# Altium PCB PCB2.PcbDoc
Units mil, origin at the board's own origin, x right, y up, seen from the top; angles counter-clockwise.
Board outline 3935 x 3935 mil, 2 copper layers (Top Layer, Bottom Layer); 64 components, 66 nets, 253 pads, 3 vias.
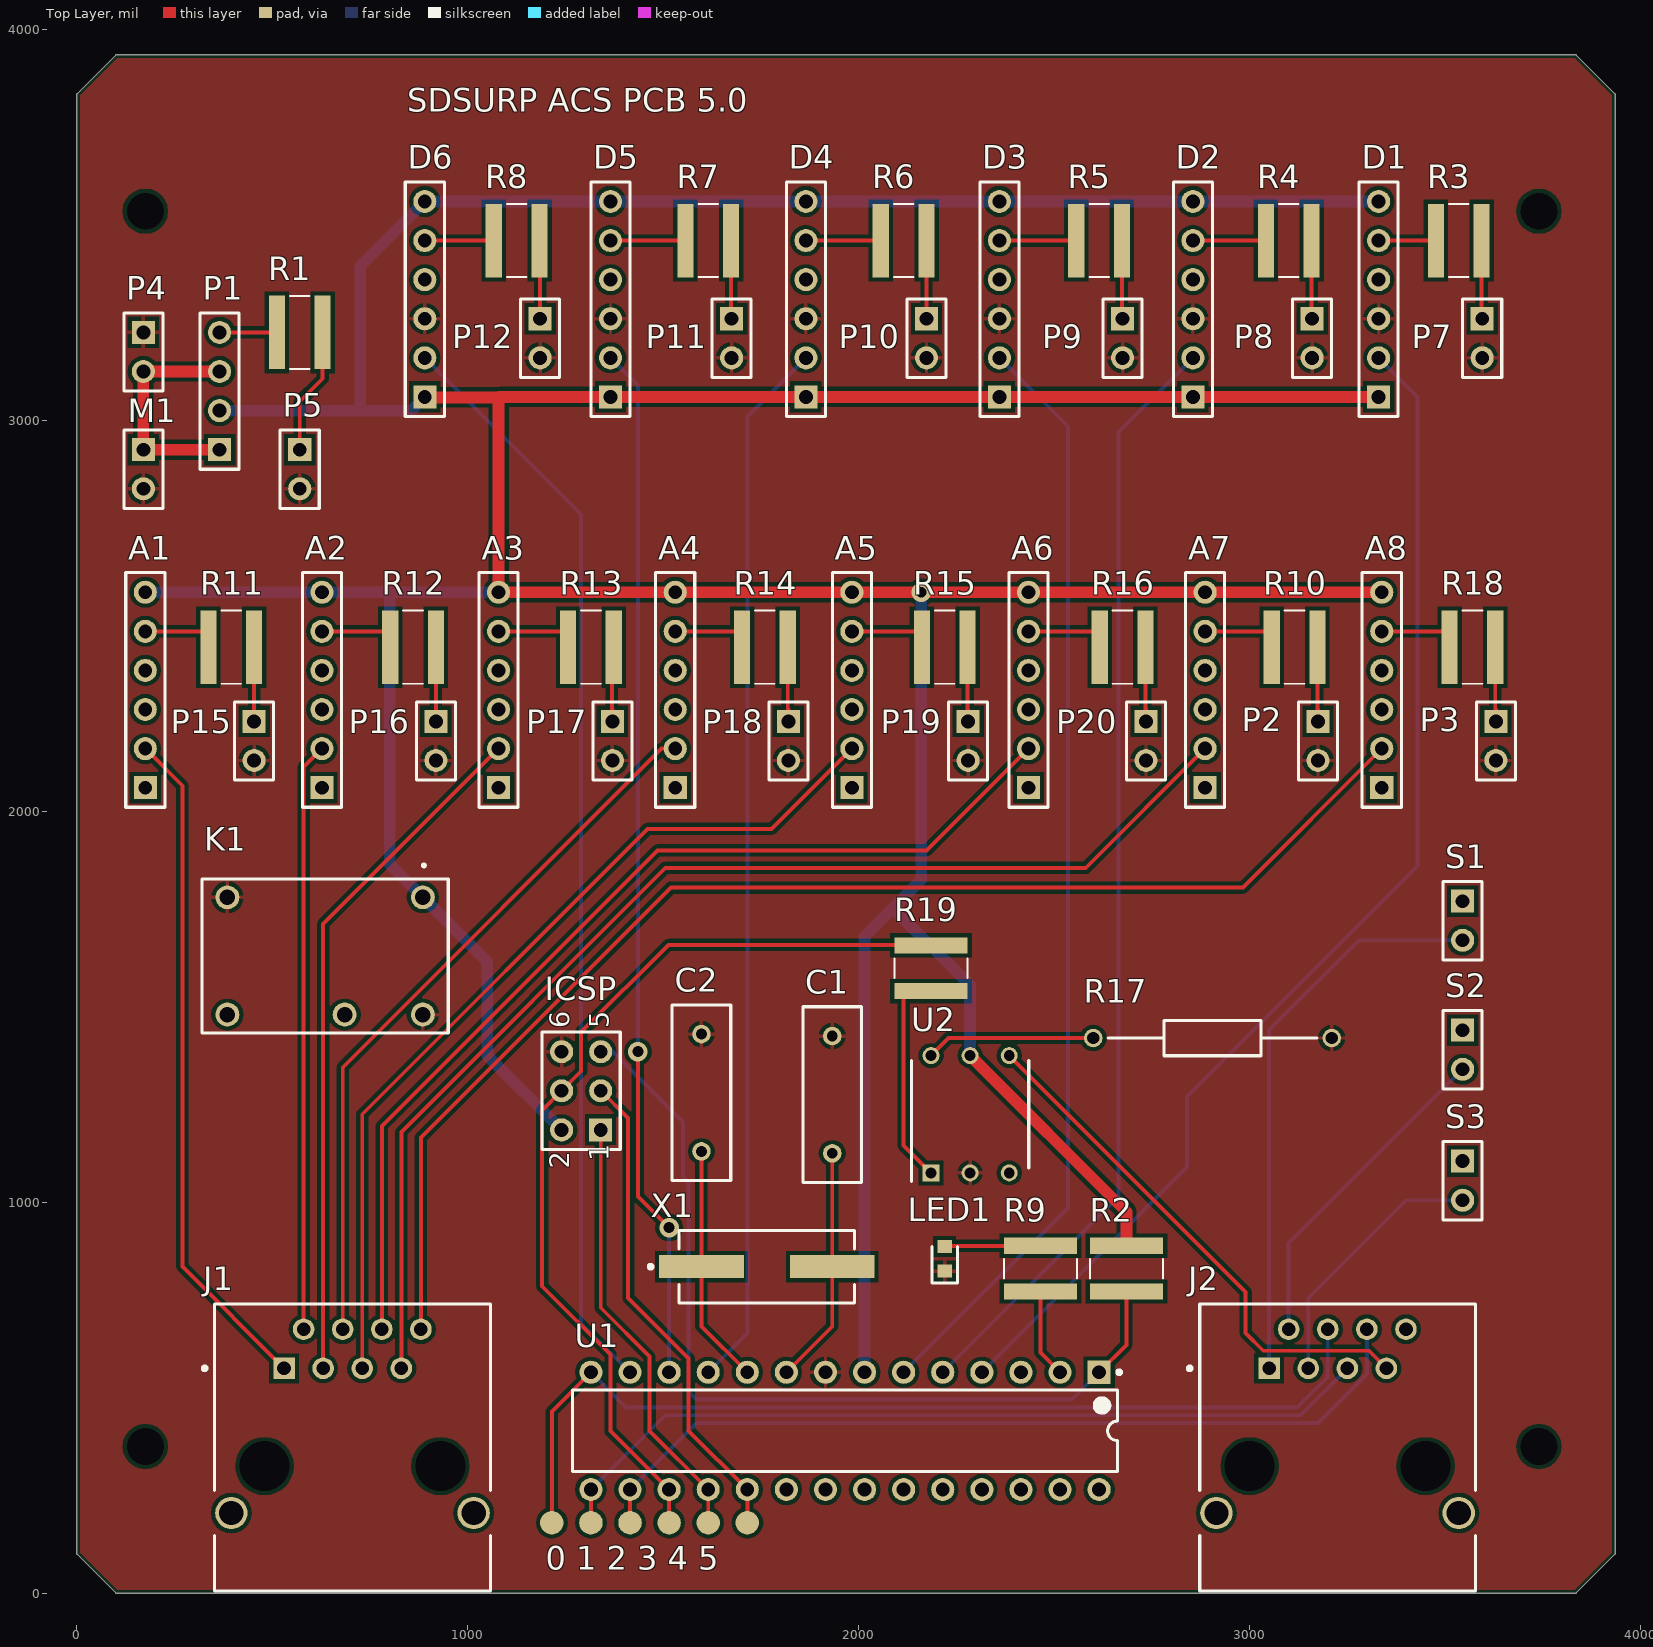
[diagram p0: Top Layer view]
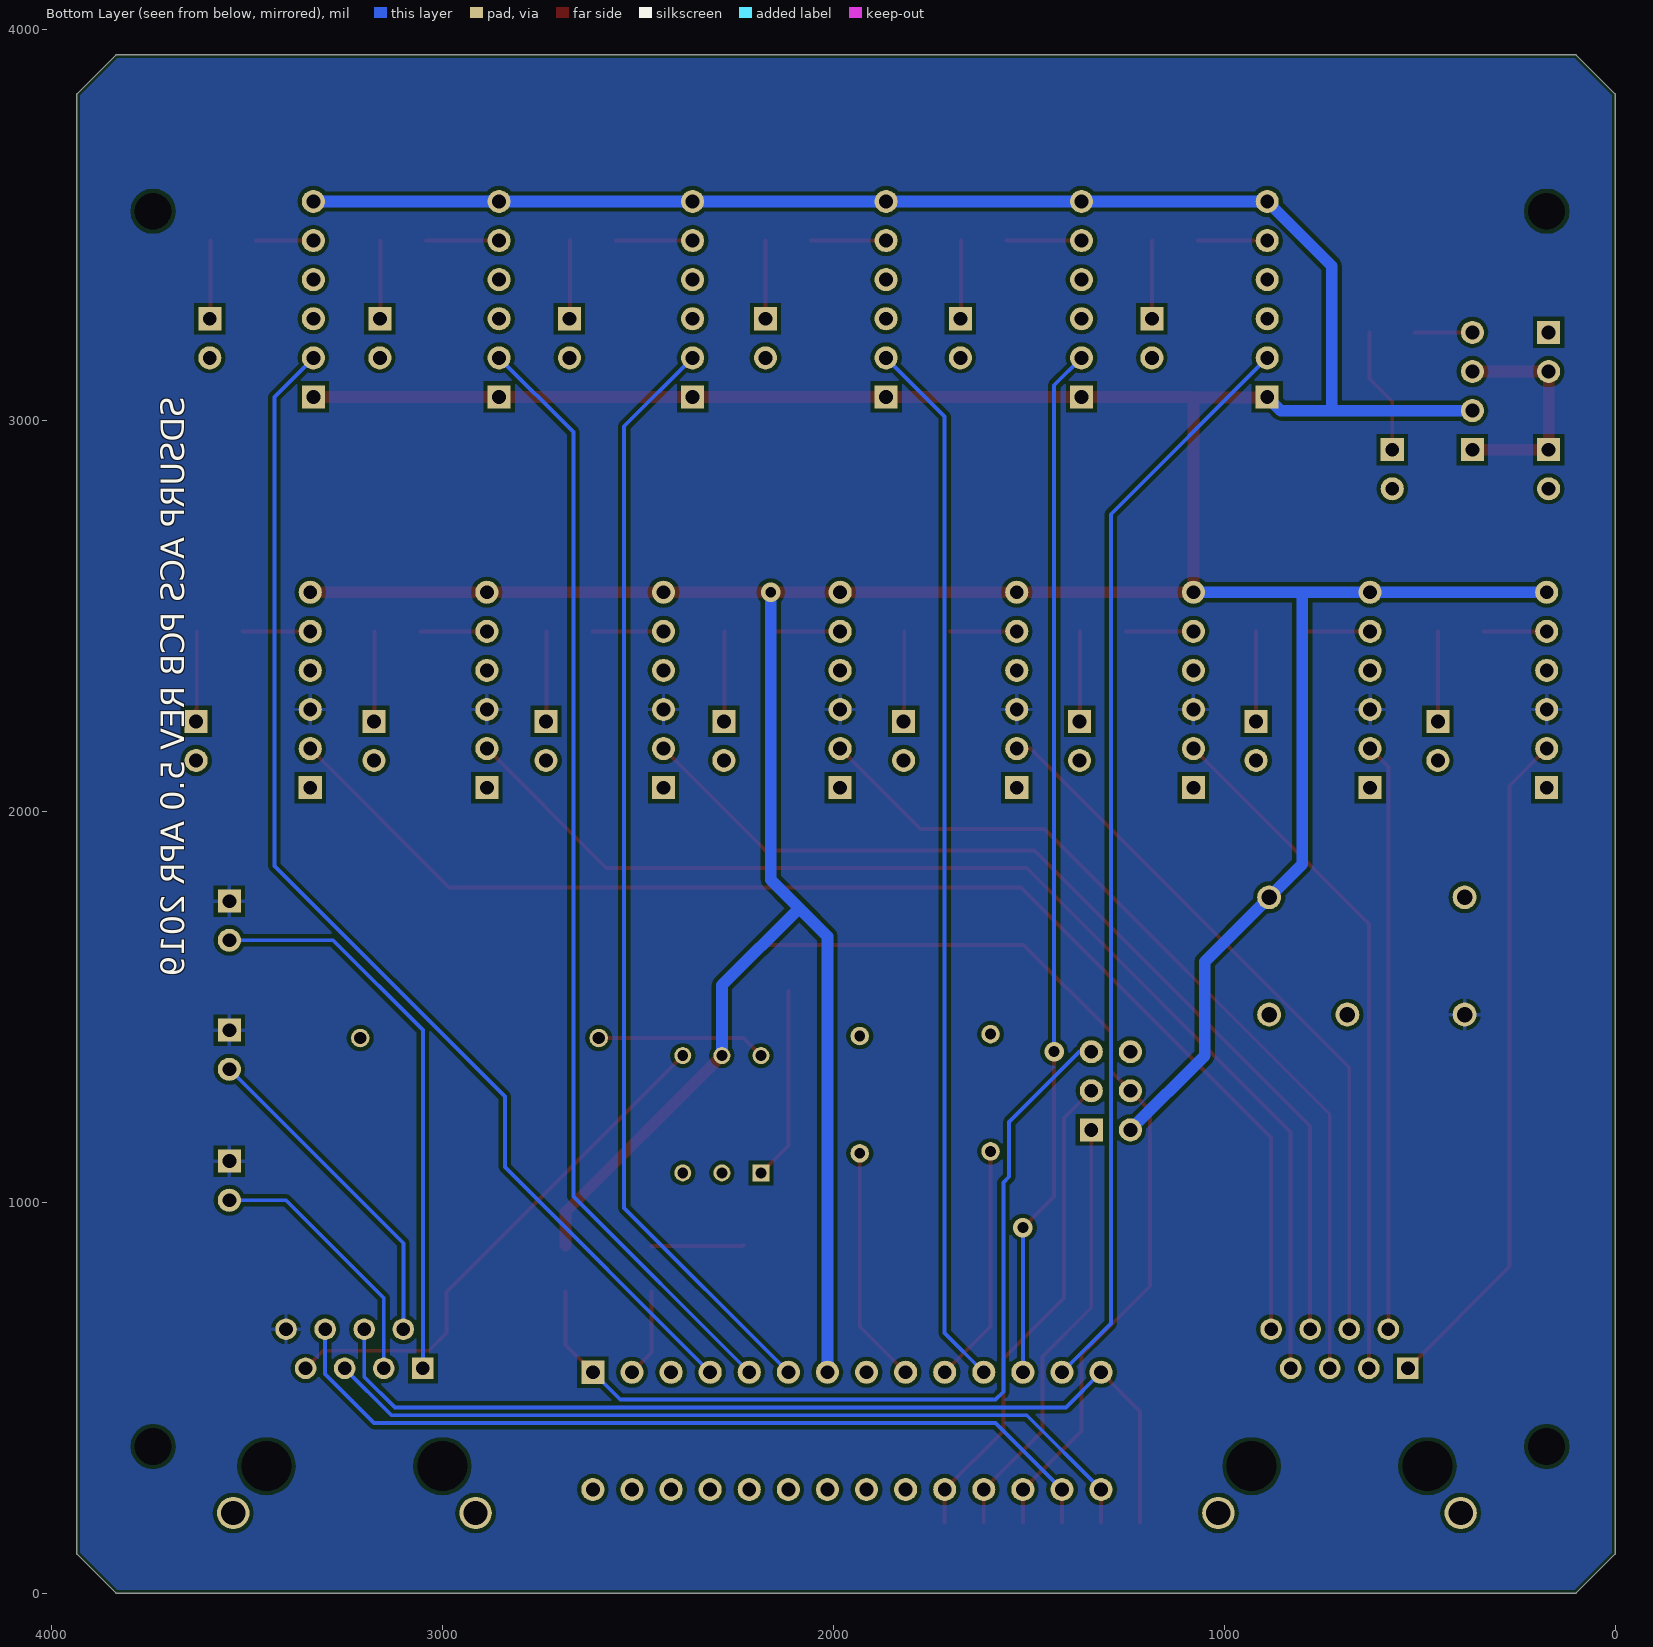
[diagram p1: Bottom Layer view, seen from below]

## Layer stack, top to bottom
Top Solder: solder mask 0.4, Solder Resist, Dk 3.5
Top Layer: signal copper 1.4
Dielectric 1: dielectric 12.6, FR-4, Dk 4.8
Bottom Layer: signal copper 1.4
Bottom Solder: solder mask 0.4, Solder Resist, Dk 3.5

## Board outline
0,100 0,3835 100,3935 3835,3935 3935,3835 3935,100 3835,0 100,0

## Design rules (kind name [scope] priority, off if disabled: settings)
BoardOutlineClearance [All] p1: gap=7.87 ignorepadtopadclearanceinfootprint=FALSE except(15.75: Arc-SplitBarrior Arc-SplitContinuation Track-SplitBarrior Track-SplitContinuation SMDPad-SplitBarrior SMDPad-SplitContinuation THPad-SplitBarrior THPad-SplitContinuation Via-SplitBarrior Via-SplitContinuation Fill-SplitBarrior Fill-SplitContinuation Poly-SplitBarrior Poly-SplitContinuation Region-SplitBarrior Region-SplitContinuation Text-SplitBarrior Text-SplitContinuation)
Clearance [All] p1: gap=10 ignorepadtopadclearanceinfootprint=FALSE except(0: Arc-Hole Track-Hole SMDPad-Hole THPad-Hole Via-Hole Fill-Hole Poly-Hole Region-Hole Text-Hole)
PolygonConnect [All] p1: connectstyle=Relief reliefconductorwidth=10 reliefentries=4 polygonreliefangle="90 Angle" airgapwidth=10
RoutingVias [All] p1: holewidth=28 width=50 viastyle="Through Hole" minholewidth=28 minwidth=50 maxholewidth=28 maxwidth=50
SolderMaskExpansion [All] p1: expansion=4
Width power [(InNet('NetM1_1') OR InNet('VCC'))] p1: maxlimit=30 minlimit=30 preferedwidth=30 minimp=50.000000 maximp=50.000000 favimp=50.000000
Width [All] p2: maxlimit=10 minlimit=10 preferedwidth=10
30 further rules are at their usual default settings.

## Components (designator, comment, footprint, x,y, rotation, side; value= is the part's Value field where it differs from the comment)
A1 "ANALOG1" HDR1X6 175,2060.39 r90 top
A2 "ANALOG2" HDR1X6 626.86,2060.39 r90 top
A3 "ANALOG3" HDR1X6 1078.73,2060.39 r90 top
A4 "ANALOG4" HDR1X6 1530.59,2060.39 r90 top
A5 "ANALOG5" HDR1X6 1982.45,2060.39 r90 top
A6 "ANALOG6" HDR1X6 2434.32,2060.39 r90 top
A7 "ANALOG7" HDR1X6 2886.18,2060.39 r90 top
A8 "ANALOG8" HDR1X6 3338.04,2060.39 r90 top
C1 "Cap" RAD-0.3 1932.32,1275 r90 top value=22pF
C2 "Cap" RAD-0.3 1597.68,1280 r90 top value=22pF
D1 "DIGITAL1" HDR1X6 3330,3060 r90 top
D2 "DIGITAL2" HDR1X6 2855,3060 r90 top
D3 "DIGITAL3" HDR1X6 2360,3060 r90 top
D4 "DIGITAL4" HDR1X6 1865,3060 r90 top
D5 "DIGITAL5" HDR1X6 1365,3060 r90 top
D6 "IGNITER" HDR1X6 890,3060 r90 top
ICSP "ICSP" HDR2X3 1340,1185 r90 top
J1 "ETH0" TECO-5555153-1_V 705,325 r0 top
J2 "ETH1" TECO-5555153-1_V 3225,325 r0 top
K1 "G6E-134P-ST-US-DC6" G6E-134P-US 949.96,1630 r180 top
LED1 "SML-D12U1WT86" LEDC1608X65N 2220,855.2 r90 top
M1 "MLTM" HDR1X2 170,2925 r270 top
P1 "ABT" HDR1X4 365,2925 r90 top
P2 "LOX VNT LED" HDR1X2 3175,2230 r270 top
P3 "LOX VNT LED" HDR1X2 3630,2230 r270 top
P4 "PWR" HDR1X2 170,3225 r270 top
P5 "ABT LED" HDR1X2 570,2925 r270 top
P7 "D1_LED" HDR1X2 3595,3260 r270 top
P8 "D2_LED" HDR1X2 3160,3260 r270 top
P9 "D3_LED" HDR1X2 2675,3260 r270 top
P10 "D4_LED" HDR1X2 2173.46,3260 r270 top
P11 "D5_LED" HDR1X2 1675,3260 r270 top
P12 "D6_LED" HDR1X2 1185,3260 r270 top
P15 "LOX VNT LED" HDR1X2 453.42,2230 r270 top
P16 "LOX VNT LED" HDR1X2 918.46,2230 r270 top
P17 "LOX VNT LED" HDR1X2 1370,2230 r270 top
P18 "LOX VNT LED" HDR1X2 1820,2230 r270 top
P19 "LOX VNT LED" HDR1X2 2280,2230 r270 top
P20 "LOX VNT LED" HDR1X2 2735,2230 r270 top
R1 "Res3" *RESC3146X60N 570,3225 r180 top value=220
R2 "Res3" *RESC3146X60N 2685,830 r270 top value=10K
R3 "Res3" *RESC3146X60N 3535.04,3460 r180 top value=220
R4 "Res3" *RESC3146X60N 3100,3460 r180 top value=220
R5 "Res3" *RESC3146X60N 2615,3460 r180 top value=220
R6 "Res3" *RESC3146X60N 2115,3460 r180 top value=220
R7 "Res3" *RESC3146X60N 1615,3460 r180 top value=220
R8 "Res3" *RESC3146X60N 1125,3460 r180 top value=220
R9 "Res3" *RESC3146X60N 2465,830 r270 top value=220
R10 "Res3" *RESC3146X60N 3115,2420 r180 top value=220
R11 "Res3" *RESC3146X60N 394.96,2420 r180 top value=220
R12 "Res3" *RESC3146X60N 860,2420 r180 top value=220
R13 "Res3" *RESC3146X60N 1315,2420 r180 top value=220
R14 "Res3" *RESC3146X60N 1760,2420 r180 top value=220
R15 "Res3" *RESC3146X60N 2220,2420 r180 top value=220
R16 "Res3" *RESC3146X60N 2675,2420 r180 top value=220
R17 "1M" RESAD1550W60L630D230 2600,1420 r0 top
R18 "Res3" *RESC3146X60N 3570,2420 r180 top value=220
R19 "Res3" *RESC3146X60N 2185,1598.46 r90 top value=10K
S1 "IGN SFT" HDR1X2 3545,1770 r270 top
S2 "PRESS SFT" HDR1X2 3545,1440 r270 top
S3 "LNCH SFT" HDR1X2 3545,1105 r270 top
U1 "ATmega328P-PU" 28P3 1965,415 r270 top
U2 "4N35" DIP762W50P254L712H450Q6N 2285,1225 r90 top
X1 "16MHz Clock" CFM-HCM49-2_V 1765,835 r0 top

## Footprints (in the part's own frame and the unit in brackets; to place one, negate y for a bottom-side part, rotate by r counter-clockwise, add the part's x,y. Pads: shape width x height; smd on the part's side, far side on the other; paste and mask are expansions set on the pad)
28P3 [mm] "28-Pin Plastic Dual In-Line Package (PDIP)"
  rect 1.5x1.5 hole 0.9: 1(-3.81,16.51)
  round 1.5 hole 0.9: 2(-3.81,13.97) 3(-3.81,11.43) 4(-3.81,8.89) 5(-3.81,6.35) 6(-3.81,3.81) 7(-3.81,1.27) 8(-3.81,-1.27) 9(-3.81,-3.81) 10(-3.81,-6.35) 11(-3.81,-8.89) 12(-3.81,-11.43) 13(-3.81,-13.97) 14(-3.81,-16.51) 15(3.81,-16.51) 16(3.81,-13.97) 17(3.81,-11.43) 18(3.81,-8.89) 19(3.81,-6.35) 20(3.81,-3.81) 21(3.81,-1.27) 22(3.81,1.27) 23(3.81,3.81) 24(3.81,6.35) 25(3.81,8.89) 26(3.81,11.43) 27(3.81,13.97) 28(3.81,16.51)
  silkscreen extent -3.93,-17.7 2.65,17.94, body extent -3.6,-17.65 3.6,17.65, height 4.58
*RESC3146X60N [mm]
  rect 1.05x4.77 smd: 1(-1.485,0) 2(1.485,0)
  silkscreen extent -0.64,-2.38 0.64,2.38
CFM-HCM49-2_V [mm] "SMD, 2-Leads, Body 11.4x4.7mm, Pitch 8.5mm"
  rect 5.5x1.5 smd: 1(-4.25,0) 2(4.25,0)
  silkscreen extent -7.67,-2.35 5.7,2.35, body extent -5.7,-2.35 5.7,2.35, height 4.3
DIP762W50P254L712H450Q6N [mm]
  rect 1.1x1.1 hole 0.7: 1(-3.81,2.54)
  round 1.1 hole 0.7: 2(-3.81,0) 3(-3.81,-2.54) 4(3.81,-2.54) 5(3.81,0) 6(3.81,2.54)
  silkscreen extent -4.36,-3.81 3.5,3.81, body extent -3.94,-3.56 3.94,3.56, height 4.5
G6E-134P-US [mm]
  round 1.55 hole 1: 1(1.65,-3.81) 6(14.35,-3.81) 7(14.35,3.81) 10(6.73,3.81) 12(1.65,3.81)
  silkscreen extent 0,-5.97 16,5
HDR1X2 [mm] "Connector; Header; 2 Position"
  rect 1.5x1.5 hole 0.9: 1(0,0)
  round 1.5 hole 0.9: 2(2.54,0)
  silkscreen extent -1.27,-1.27 3.81,1.27
HDR1X4 [mm] "Connector; Header; 4 Position"
  rect 1.5x1.5 hole 0.9: 1(0,0)
  round 1.5 hole 0.9: 2(2.54,0) 3(5.08,0) 4(7.62,0)
  silkscreen extent -1.27,-1.27 8.89,1.27
HDR1X6 [mm] "Connector; Header; 6 Position"
  rect 1.5x1.5 hole 0.9: 1(0,0)
  round 1.5 hole 0.9: 2(2.54,0) 3(5.08,0) 4(7.62,0) 5(10.16,0) 6(12.7,0)
  silkscreen extent -1.27,-1.27 13.97,1.27
HDR2X3 [mm] "Connector; Header; 3x2 Position"
  rect 1.5x1.5 hole 0.9: 1(0,0)
  round 1.5 hole 0.9: 2(0,2.54) 3(2.54,0) 4(2.54,2.54) 5(5.08,0) 6(5.08,2.54)
  silkscreen extent -1.27,-1.27 6.35,3.81
LEDC1608X65N [mm]
  rect 0.85x0.95 smd: 1(-0.8,0) 2(0.8,0)
  silkscreen extent -1.58,-0.82 0.8,0.82
RAD-0.3 [mm] "Radial Cap, Thru-Hole; 2 Leads; 0.3 in Pin Spacing"
  round 1.2 hole 0.7: 1(-3.81,0) 2(3.81,0)
  silkscreen extent -5.71,-1.91 5.71,1.91
RESAD1550W60L630D230 [mm]
  round 1.2 hole 0.8: 1(0,0) 2(15.5,0)
  silkscreen extent 0.95,-1.15 14.55,1.15, body extent -0.3,-1.25 15.8,1.25, height 2.49
TECO-5555153-1_V [mm] "RJ45, 8-Leads, Body 18.67x17.91mm, Pitch 1.27mm"
  rect 1.4x1.4 hole 0.89: 1(-4.445,6.35)
  round 1.4 hole 0.89: 2(-3.175,8.89) 3(-1.905,6.35) 4(-0.635,8.89) 5(0.635,6.35) 6(1.905,8.89) 7(3.175,6.35) 8(4.445,8.89)
  round 2.95 hole 3.25 unplated: MH1(-5.715,0) MH2(5.715,0)
  round 2.1 hole 1.57: S1(-7.875,-3.05) S2(7.875,-3.05)
  silkscreen extent -9.73,-8.13 8.96,10.54, body extent -8.89,-8.13 8.89,10.54, height 13.2

## Part data
A1 A2 A3 A4 A5 A6 A7 A8 D1 D2 D3 D4 D5 D6: library part "Header 6", "Header, 6-Pin", LatestRevisionDate=17-Jul-2002, LatestRevisionNote="Re-released for DXP Platform.", Publisher="Altium Limited"
C1 C2: "Capacitor", LatestRevisionDate=17-Jul-2002, LatestRevisionNote="Re-released for DXP Platform.", PackageDescription="Radial Cap, Thru-Hole; 2 Leads; 0.3 in Pin Spacing", PackageReference=RAD-0.3, Published=8-Jun-2000, Publisher="Altium Limited"
ICSP: library part "Header 3X2", "Header, 3-Pin, Dual row", LatestRevisionDate=17-Jul-2002, LatestRevisionNote="Re-released for DXP Platform.", Publisher="Altium Limited"
J1 J2: library part CMP-2000-05640-1, "RJ45 Connector, Pitch 1.27 mm, 8 Position, Height 13.08 mm, Tail Length 3.81 mm, -40 to 85 degC, RoHS, Tray", LED Color=DoesNotContainLED, Manufacturer="TE Connectivity", Operating Temperature=-40°C~85°C, Package Description="RJ45 Connector, Pitch 1.27 mm, 8 Position, Height 13.08 mm, Tail Length 3.81 mm", Package Reference=5555153-1, Ratings=Cat3, Standard Package=136, 3D Model=5555153-1.pdf, Catalog Drawings="JackSideEntryRightAngle /  / JackSideEntryRightAngleTop", Category=Connectors,Interconnects, Connector Type=Jack, Contact Finish=Gold, Contact Finish Thickness=50µin(1.27µm), Contact Material=PhosphorBronze, Datasheet URL=http://www.te.com/commerce/DocumentDelivery/DDEController?Action=srchrtrv&DocNm=5555153&DocType=Customer+Drawing&DocLang=English&DocFormat=pdf&PartCntxt=5555153-1, Datasheet Version="Rev. D2, 05/2016", Dynamic Catalog=ModularJacks, Family=ModularConnectors-Jacks, Features=BoardLock,PanelStops, Housing Material=PolybutyleneTerephthalate(PBT),Polyester, Manufacturer URL=http://www.te.com/, Mounting Technology=ThroughHole, Mounting Type=ThroughHole, Number of Ports=1, Number of Positions/Contacts=8p8c(RJ45,Ethernet), Number of Rows=1, Orientation=90°Angle(Right), Other Names=A31438, Packaging=Tray, RoHS Information=5555153-1StatementofCompliance, Shielding=Shielded, Tab Direction=Down, Termination=Solder
K1: "Relay or Contactor", Manufacturer_Name="Omron Electronics", Mouser Part Number=653-G6E134PSTUSDC6, Allied_Number=70381892, Allied Price/Stock=https://www.alliedelec.com/omron-electronic-components-g6e-134p-st-us-dc6/70381892/, Datasheet Link=http://omronfs.omron.com/en_US/ecb/products/pdf/en-g6e.pdf, Manufacturer_Part_Number=G6E-134P-ST-US-DC6, Mouser Price/Stock=https://www.mouser.com/Search/Refine.aspx?Keyword=653-G6E134PSTUSDC6
LED1: "LED", Manufacturer_Name="ROHM Semiconductor", Mouser Part Number=755-SML-D12U1WT86, RS Part Number=1332870, Datasheet Link=https://componentsearchengine.com/Datasheets/1/SML-D12U1WT86.pdf, Height=0.65mm, Manufacturer_Part_Number=SML-D12U1WT86, Mouser Price/Stock=https://www.mouser.com/Search/Refine.aspx?Keyword=755-SML-D12U1WT86, RS Price/Stock=http://uk.rs-online.com/web/p/products/1332870
M1 P2 P3 P4 P5 P7 P8 P9 P10 P11 P12 P15 P16 P17 P18 P19 P20 S1 S2 S3: library part "Header 2", "Header, 2-Pin", LatestRevisionDate=17-Jul-2002, LatestRevisionNote="Re-released for DXP Platform.", Publisher="Altium Limited"
P1: library part "Header 4", "Header, 4-Pin", LatestRevisionDate=17-Jul-2002, LatestRevisionNote="Re-released for DXP Platform.", Publisher="Altium Limited"
R1 R2 R3 R4 R5 R6 R7 R8 R9 R10 R11 R12 R13 R14 R15 R16 R18 R19: "Resistor", LatestRevisionDate=29-May-2009, LatestRevisionNote="IPC-7351 Footprint Added.", PackageDescription="Chip Resistor", PackageReference=J1-0603, Published=8-Jun-2000, Publisher="Altium Limited"
R17: library part YR1B1M0CC, "Resistor", Manufacturer_Name="TE Connectivity", Mouser Part Number=279-YR1B1M0CC, RS Part Number=1649061, Allied_Number=70300029, Allied Price/Stock=https://www.alliedelec.com/te-connectivity-yr1b1m0cc/70300029/, Datasheet Link=http://www.te.com/commerce/DocumentDelivery/DDEController?Action=showdoc&DocId=Data+Sheet%7F1773265%7FA%7Fpdf%7FEnglish%7FENG_DS_1773265_A.pdf%7F2-1676913-7, Manufacturer_Part_Number=YR1B1M0CC, Mouser Price/Stock=https://www.mouser.com/Search/Refine.aspx?Keyword=279-YR1B1M0CC, RS Price/Stock=http://uk.rs-online.com/web/p/products/1649061
U1: library part CMP-0095-00013-2, "8-bit AVR Microcontroller, 32KB Flash, 1KB EEPROM, 2KB SRAM, 28-pin PDIP, Industrial Grade (-40°C to 85°C)", ComponentLink1Description="Manufacturer URL", ComponentLink1URL=http://www.atmel.com/, ComponentLink2Description="ATmega48A/48PA/88A/88PA/168A/168PA/328/328P Datasheet", ComponentLink2URL=http://www.atmel.com/dyn/resources/prod_documents/8271.pdf, ComponentLink3Description="ATmega48A/48PA/88A/88PA/168A/168PA/328/328P Summary", ComponentLink3URL=http://www.atmel.com/dyn/resources/prod_documents/8271S.pdf, DatasheetVersion="revD, May-2011", PackageReference=28P3, PackageVersion="revB, Sep-2001", RevisionNote="DatasheetVersion updated. URLs added."
U2: "Transistor", Manufacturer_Name=Isocom, RS Part Number=1712954, Datasheet Link=http://uk.rs-online.com/web/p/products/597302, Height=4.5mm, Manufacturer_Part_Number=4N35, RS Price/Stock=http://uk.rs-online.com/web/p/products/1712954
X1: library part CMP-1215-00001-1, "At-Cut Crystal Unit, 3.5 to 30 MHz, -40 to 85 degC, 2-Pin 11.4×4.7×4.3 mm SMD, RoHS, Reel", Manufacturer="Citizen Finetech Miyota", Operating Temperature="-40 to 85 degC", PartNumber=HCM49-8.000MABJ-UT, C0="7 pF Max.", ComponentLink1Description="Manufacturer URL", ComponentLink1URL=http://cfm.citizen.co.jp/english/index.html, ComponentLink2Description=Datasheet, ComponentLink2URL=http://cfm.citizen.co.jp/english/product/pdf/HCM49.pdf, ComponentLink3Description="Package Specification", ComponentLink3URL=http://cfm.citizen.co.jp/english/product/pdf/HCM49.pdf, DatasheetVersion=Jan-12, DL="100 uW", f0="3.5 to 30 MHz", IR="500 MOhm Min.", Mounting Technology="Surface Mount", PackageDescription="2-Pin Surface Mount, Body 11.4 x 4.7 mm, Pitch 8.5 mm", Packing=Reel, R1="50 to 200 Ohm", RoHS=TRUE

## Free pads (board coordinates)
  round 60 hole 94.49: 2(175,3535) 3(3740,3535) 4(175,375) 5(3740,375)
  round 60 smd: 6(1315,180) 7(1415,180) 8(1515,180) 9(1615,180) 10(1715,180) 11(1215,180)

## Via types
v1: diameter 50, hole 28, Top Layer to Bottom Layer, 3 vias

## Nets (pads, with @x,y where several pads share a name; then routed paths per layer and width w, separated by ;. In a path a pad name is that pad's centre, name@x,y a point inside that pad or via, vN(x,y) a via of type N, cw(c..) or ccw(c..) an arc to the next point about the centre after c; other vN are vias at no path point)
A1: A1.2 J1.1 | length 1732.4
  Top Layer w10: A1.2 270,2065.39 270,835 J1.1
A2: A2.2 J1.2 | length 1504.8
  Top Layer w10: J1.2 580,2113.53 A2.2
A3: A3.2 J1.3 | length 1771.3
  Top Layer w10: J1.3 630,1711.67 A3.2
A4: A4.2 J1.4 | length 1858.3
  Top Layer w10: J1.4 680,1345 1495.39,2160.39 A4.2
A5: A5.2 J1.5 | length 2289.9
  Top Layer w10: J1.5 730,1225 1460,1955 1777.06,1955 A5.2
A6: A6.2 J1.6 | length 2574.2
  Top Layer w10: J1.6 780,1195 1485,1900 2173.92,1900 A6.2
A7: A7.2 J1.7 | length 3067.3
  Top Layer w10: J1.7 830,1180 1505,1855 2580.79,1855 A7.2
A8: A8.2 J1.8 | length 3360.3
  Top Layer w10: J1.8 880,1165 1520,1805 2982.65,1805 A8.2
GND: C1.2 C2.2 D1.3 D2.3 D3.3 D4.3 D5.3 D6.3 ICSP.6 K1.6 K1.12 LED1.1 M1.2 P2.2 P3.2 P4.1 P5.2 P7.2 P8.2 P9.2 P10.2 P11.2 P12.2 P15.2 P16.2 P17.2 P18.2 P19.2 P20.2 R17.2 U1.8 U2.2
"IGN SFT": J2.1 S1.2 | length 1455.3
  Bottom Layer w10: J2.1 3050,1440 3280,1670 S1.2
IGN_OUT: J2.7 U2.4 | length 1357.9
  Top Layer w10: U2.4 2990,770 2990,665 3035,620 3305,620 J2.7
"LNCH SFT": J2.3 S3.2 | length 678.6
  Bottom Layer w10: J2.3 3150,755 3400,1005 S3.2
NetA1_5: A1.5 R11.2 | length 161.5
  Top Layer w10: A1.5 R11.2@336.5,2460.39
NetA2_5: A2.5 R12.2 | length 174.8
  Top Layer w10: A2.5 801.14,2460.39 R12.2@801.54,2460
NetA3_5: A3.5 R13.2 | length 173
  Top Layer w10: A3.5 1251.14,2460.39 R13.2@1251.54,2460
NetA4_5: A4.5 R14.2 | length 171.1
  Top Layer w10: A4.5 1701.14,2460.39 R14.2@1701.54,2460
NetA5_5: A5.5 R15.2 | length 179.1
  Top Layer w10: A5.5 R15.2@2161.54,2460.39
NetA6_5: A6.5 R16.2 | length 182.4
  Top Layer w10: A6.5 2616.14,2460.39 R16.2@2616.54,2460
NetA7_5: A7.5 R10.2 | length 170.5
  Top Layer w10: A7.5 2886.57,2460 R10.2@3056.54,2460
NetA8_5: A8.5 R18.2 | length 173.5
  Top Layer w10: A8.5 R18.2@3511.54,2460.39
NetC1_1: C1.1 U1.9 X1.2 | length 608.6
  Top Layer w10: U1.9 1932.32,682.32 X1.2 C1.1
NetC2_1: C2.1 U1.10 X1.1 | length 613.6
  Top Layer w10: C2.1 X1.1 1597.68,682.32 U1.10
NetD1_5: D1.5 R3.2 | length 146.6
  Top Layer w10: D1.5 R3.2
NetD2_5: D2.5 R4.2 | length 186.5
  Top Layer w10: D2.5 R4.2
NetD3_5: D3.5 R5.2 | length 196.5
  Top Layer w10: D3.5 R5.2
NetD4_5: D4.5 R6.2 | length 191.5
  Top Layer w10: D4.5 R6.2
NetD5_5: D5.5 R7.2 | length 191.5
  Top Layer w10: D5.5 R7.2
NetD6_5: D6.5 R8.2 | length 176.5
  Top Layer w10: D6.5 R8.2
NetLED1_2: LED1.2 R9.1 | length 235.6
  Top Layer w10: LED1.2@2230,890 2231.54,888.46 R9.1
NetM1_1: M1.1 P1.1 P1.3 P4.2 | length 590
  Top Layer w30: P1.1 M1.1 P4.2 P1.3
NetP1_4: P1.4 R1.2 | length 146.5
  Top Layer w10: P1.4 R1.2
NetP2_1: P2.1 R10.1 | length 200.6
  Top Layer w10: R10.1@3173.46,2460 3173.46,2261.54 3175,2260
NetP3_1: P3.1 R18.1 | length 201
  Top Layer w10: R18.1@3628.46,2460.39 3628.46,2261.54 3630,2260
NetP5_1: P5.1 R1.1 | length 324.2
  Top Layer w10: P5.1 570,3048.14 628.46,3106.6 R1.1
NetP7_1: P7.1 R3.1 | length 200.6
  Top Layer w10: R3.1 3593.5,3261.5 P7.1
NetP8_1: P8.1 R4.1 | length 200.6
  Top Layer w10: R4.1 3158.46,3261.54 P8.1
NetP9_1: P9.1 R5.1 | length 200.6
  Top Layer w10: R5.1 2673.46,3261.54 P9.1
NetP10_1: P10.1 R6.1 | length 204.9
  Top Layer w10: P10.1@2170,3260 P10.1@2173.46,3263.46 ; P10.1 P10.1@2173.46,3263.46 ; R6.1 P10.1@2173.46,3263.46
NetP11_1: P11.1 R7.1 | length 200.6
  Top Layer w10: R7.1 1673.46,3261.54 P11.1
NetP12_1: P12.1 R8.1 | length 200.6
  Top Layer w10: R8.1 1185,3458.46 P12.1
NetP15_1: P15.1 R11.1 | length 200
  Top Layer w10: 453.42,2260.39 R11.1@453.42,2460.39
NetP16_1: P16.1 R12.1 | length 199.6
  Top Layer w10: 918.46,2260.39 R12.1@918.46,2460
NetP17_1: P17.1 R13.1 | length 200.2
  Top Layer w10: R13.1@1368.46,2460 1368.46,2261.93 1370,2260.39
NetP18_1: P18.1 R14.1 | length 200.2
  Top Layer w10: R14.1@1818.46,2460 1818.46,2261.93 1820,2260.39
NetP19_1: P19.1 R15.1 | length 200.6
  Top Layer w10: R15.1@2278.46,2460.39 2278.46,2261.93 2280,2260.39
NetP20_1: P20.1 R16.1 | length 200.6
  Top Layer w10: R16.1@2733.46,2460 2733.46,2261.54 2735,2260
NetR17_1: R17.1 U2.6 | length 433.6
  Top Layer w10: U2.6 2230,1420 R17.1
NetR19_1: R19.1 U2.1 | length 494
  Top Layer w10: R19.1@2115,1540 2115,1145 U2.1
PB0: J2.4 pad.11 U1.14 | length 2502.8
  Top Layer w10: pad.11 1215,465 U1.14
  Bottom Layer w10: U1.14 1405,475 3121.72,475 3200,553.28 J2.4
PB1: J2.5 pad.6 U1.15 | length 2148.4
  Top Layer w10: pad.6 U1.15
  Bottom Layer w10: U1.15 1505,455 3130,455 J2.5
PB2: J2.6 pad.7 U1.16 | length 2217.4
  Top Layer w10: pad.7 U1.16
  Bottom Layer w10: U1.16 1585,435 3175,435 3300,560 J2.6 J2.6@3289.81,675
PB3: ICSP.4 pad.8 R19.2 U1.17 | length 2418.6
  Top Layer w10: pad.8 U1.17 1365,415 1365,610 1190,785 1190,1235 ICSP.4 1290,1335 1290,1435 1513.46,1658.46 R19.2@2185,1658.46
PB4: ICSP.1 pad.9 U1.18 | length 1118.9
  Top Layer w10: ICSP.1 1340,730 1465,605 1465,415 U1.18 pad.9
PB5: ICSP.3 pad.10 U1.19 | length 1260.3
  Top Layer w10: ICSP.3 1410,1215 1410,755 1565,600 1565,415 U1.19 pad.10
PD0: R9.2 U1.2 | length 227.2
  Top Layer w10: R9.2 2465,615 U1.2
PD1: U1.3
PD2: D1.2 U1.4 | length 3098.3
  Bottom Layer w10: U1.4 2840,1090 2840,1270 3430,1860 3430,3060 D1.2
PD3: D2.2 U1.5 | length 2860.1
  Bottom Layer w10: U1.5 2665,1015 2665,2970 D2.2
PD4: D3.2 U1.6 | length 2841.5
  Bottom Layer w10: U1.6 2535,985 2535,2985 D3.2
PD5: D4.2 U1.11 | length 2698.6
  Bottom Layer w10: U1.11 1715,665 1715,3010 D4.2
PD6: D5.2 U1.12 | length 2657.1
  Top Layer w10: v1(1435,1385) 1435,1015 v1(1515,935)
  Bottom Layer w10: D5.2 1435,3090 v1(1435,1385) ; U1.12 v1(1515,935)
PD7: D6.2 U1.13 | length 2812.5
  Bottom Layer w10: D6.2 1290,2760 1290,690 U1.13
"PRESS SFT": J2.2 S2.2 | length 849.3
  Bottom Layer w10: J2.2 3100,895 S2.2
RST: ICSP.5 R2.2 U1.1 | length 2303.6
  Top Layer w10: U1.1 2685,635 R2.2
  Bottom Layer w10: ICSP.5 1370,1385 1550,1205 1550,1065 1565,1050 1565,515 1585,495 2545,495 U1.1
SGND: A1.3 A2.3 A3.3 A4.3 A5.3 A6.3 A7.3 A8.3 J2.8 K1.7 S1.1 S2.1 S3.1
VCC: A1.6 A2.6 A3.6 A4.6 A5.6 A6.6 A7.6 A8.6 D1.1 D1.6 D2.1 D2.6 D3.1 D3.6 D4.1 D4.6 D5.1 D5.6 D6.1 D6.6 ICSP.2 K1.1 P1.2 R2.1 U1.7 U2.5 | length 14380.2
  Top Layer w30: D6.1@891.27,3058.73 1078.73,3058.73 A3.6 A4.6 A5.6 v1(2160,2560.39) A6.6 A7.6 A8.6 ; 1080,3060 D5.1 D4.1 D3.1 D2.1 D1.1@3316.02,3060 ; U2.5 2685,975 R2.1
  Bottom Layer w30: A1.6 A2.6 800,2560.39 ; P1.2 725,3025 ; D6.1@891.27,3058.73 D6.1 855,3025 725,3025 ; A3.6 800,2560.39 ; ICSP.2 1050,1375 1050,1615 K1.1 800,1865 800,2560.39 ; U1.7 2015,1680 2087.5,1752.5 ; v1(2160,2560.39) 2160,1825 2087.5,1752.5 ; U2.5 2285,1555 2087.5,1752.5 ; D1.6@3316.02,3560 D2.6 D3.6 D4.6 D5.6 D6.6 725,3395 725,3025
pads on no net: A1.1 A1.4 A2.1 A2.4 A3.1 A3.4 A4.1 A4.4 A5.1 A5.4 A6.1 A6.4 A7.1 A7.4 A8.1 A8.4 D1.4 D2.4 D3.4 D4.4 D5.4 D6.4 J1.MH1 J1.MH2 J1.S1 J1.S2 J2.MH1 J2.MH2 J2.S1 J2.S2 K1.10 U1.20 U1.21 U1.22 U1.23 U1.24 U1.25 U1.26 U1.27 U1.28 U2.3

## Polygon pours and split planes (outlines as drawn)
GND on Top Layer "Top Layer-GND" (solid, pour order 0): 0,3835 100,3935 3835,3935 3935,3835 3935,100 3835,0 100,0 0,100
SGND on Bottom Layer "Bottom Layer-SGND" (solid, pour order 2): 0,3835 100,3935 3835,3935 3935,3835 3935,100 3835,0 100,0 0,100

## Silkscreen, mask and mechanical layers (free items; w line width, h text height)
Top Overlay:
  text "SDSURP ACS PCB 5.0" at 845,3790 h60
  text "0 1 2 3 4 5" at 1200,60 h60
Bottom Overlay:
  text "SDSURP ACS PCB REV 5.0 APR 2019" at 3660,3060 h60 r270
Mechanical 1:
  the board outline again, w10

## Text inside footprints (layer, text, board x,y; h text height)
ICSP: Top Overlay "6" at 1260,1445 h50 r90; Top Overlay "5" at 1360,1445 h50 r90; Top Overlay "2" at 1260,1085 h50 r90; Top Overlay "1" at 1360,1105 h50 r90